# Altium PCB Retain-PCB.PcbDoc
Units mil, origin at the board's own origin, x right, y up, seen from the top; angles counter-clockwise.
Board outline 3300 x 2300 mil, 2 copper layers (Top Layer, Bottom Layer); 9 components, 8 nets, 68 pads, 30 vias.
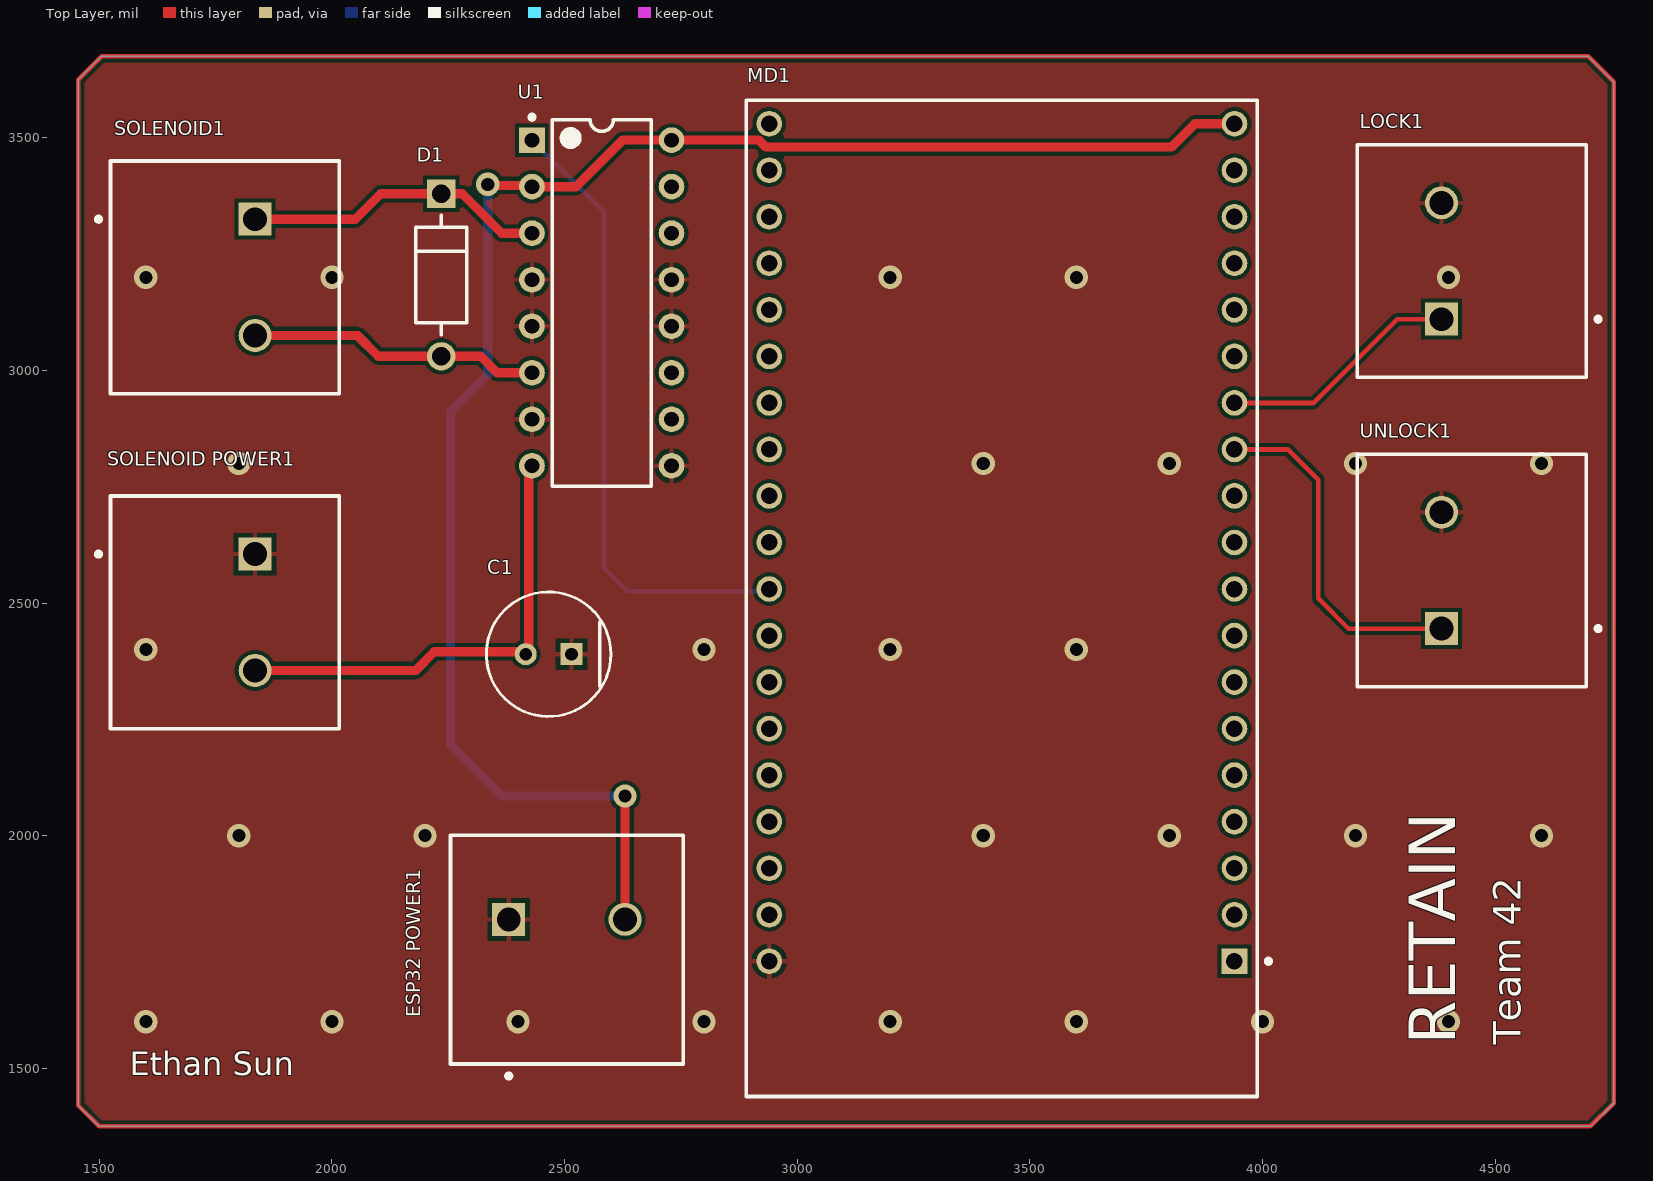
[diagram p0: Top Layer view]
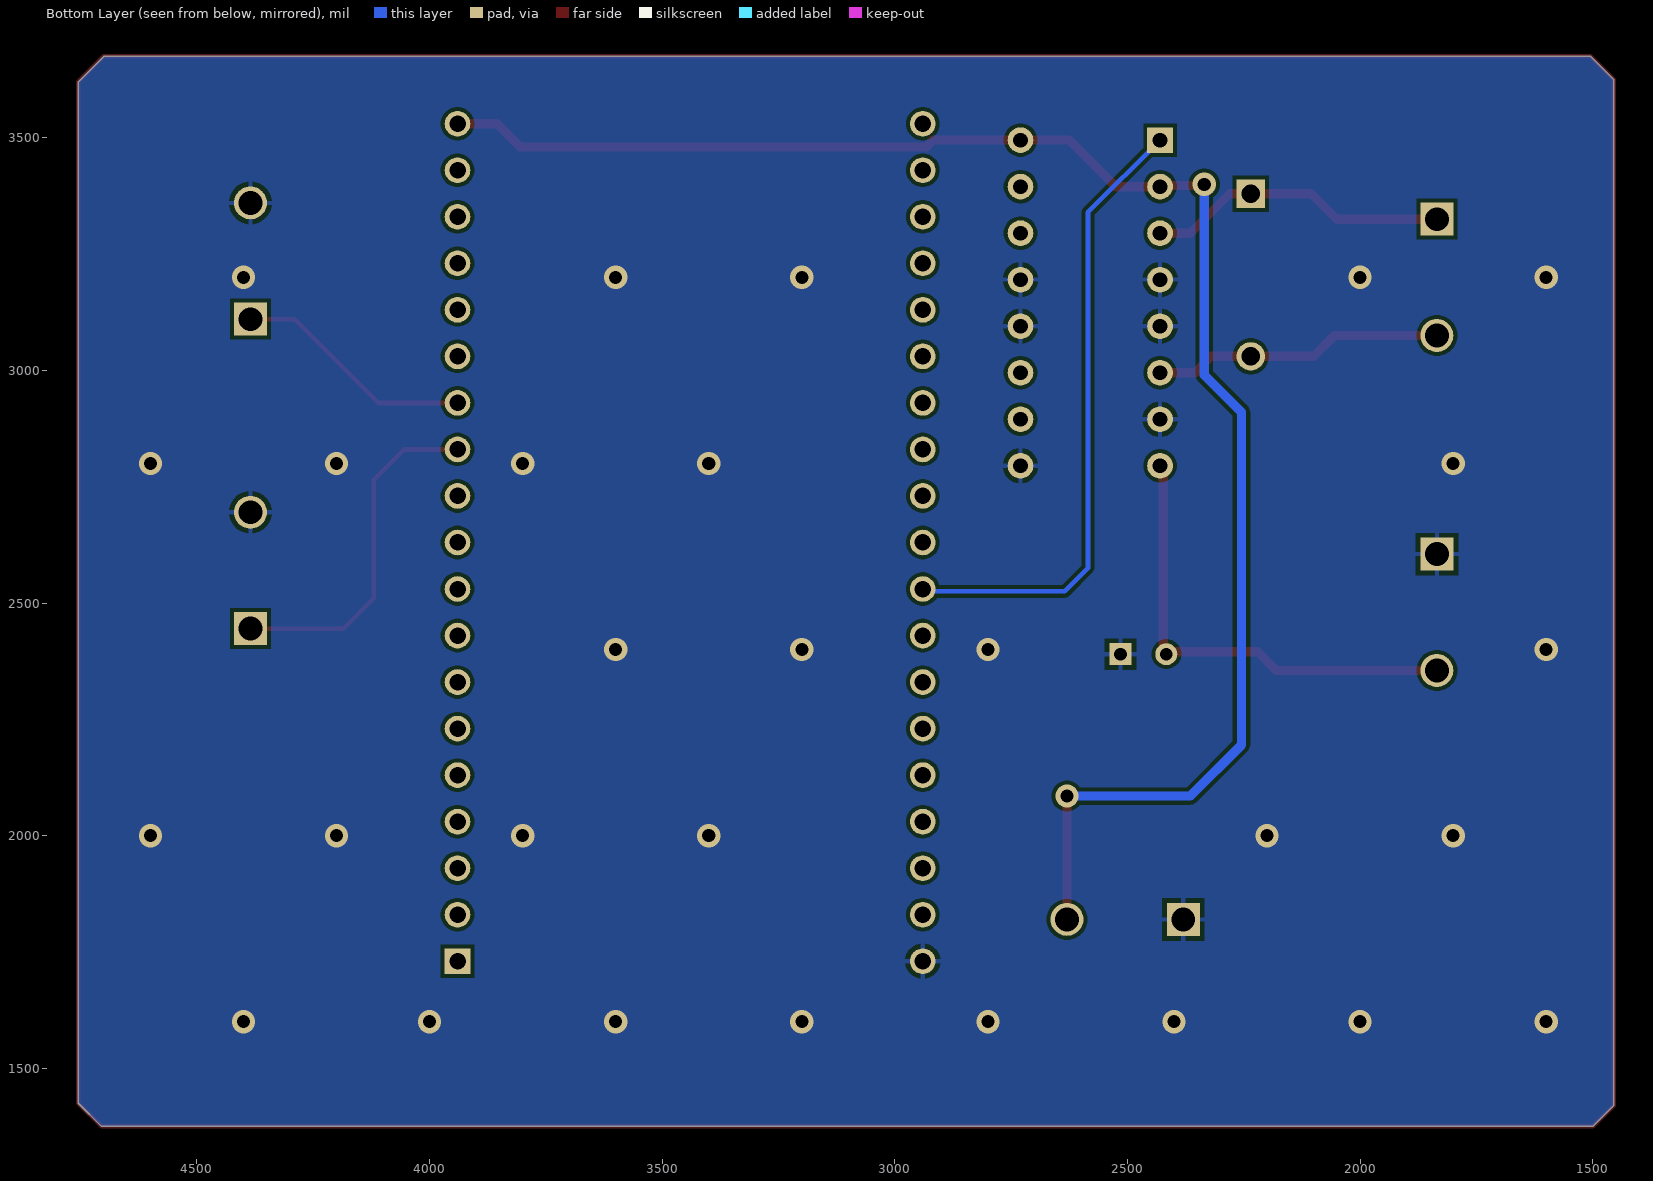
[diagram p1: Bottom Layer view, seen from below]
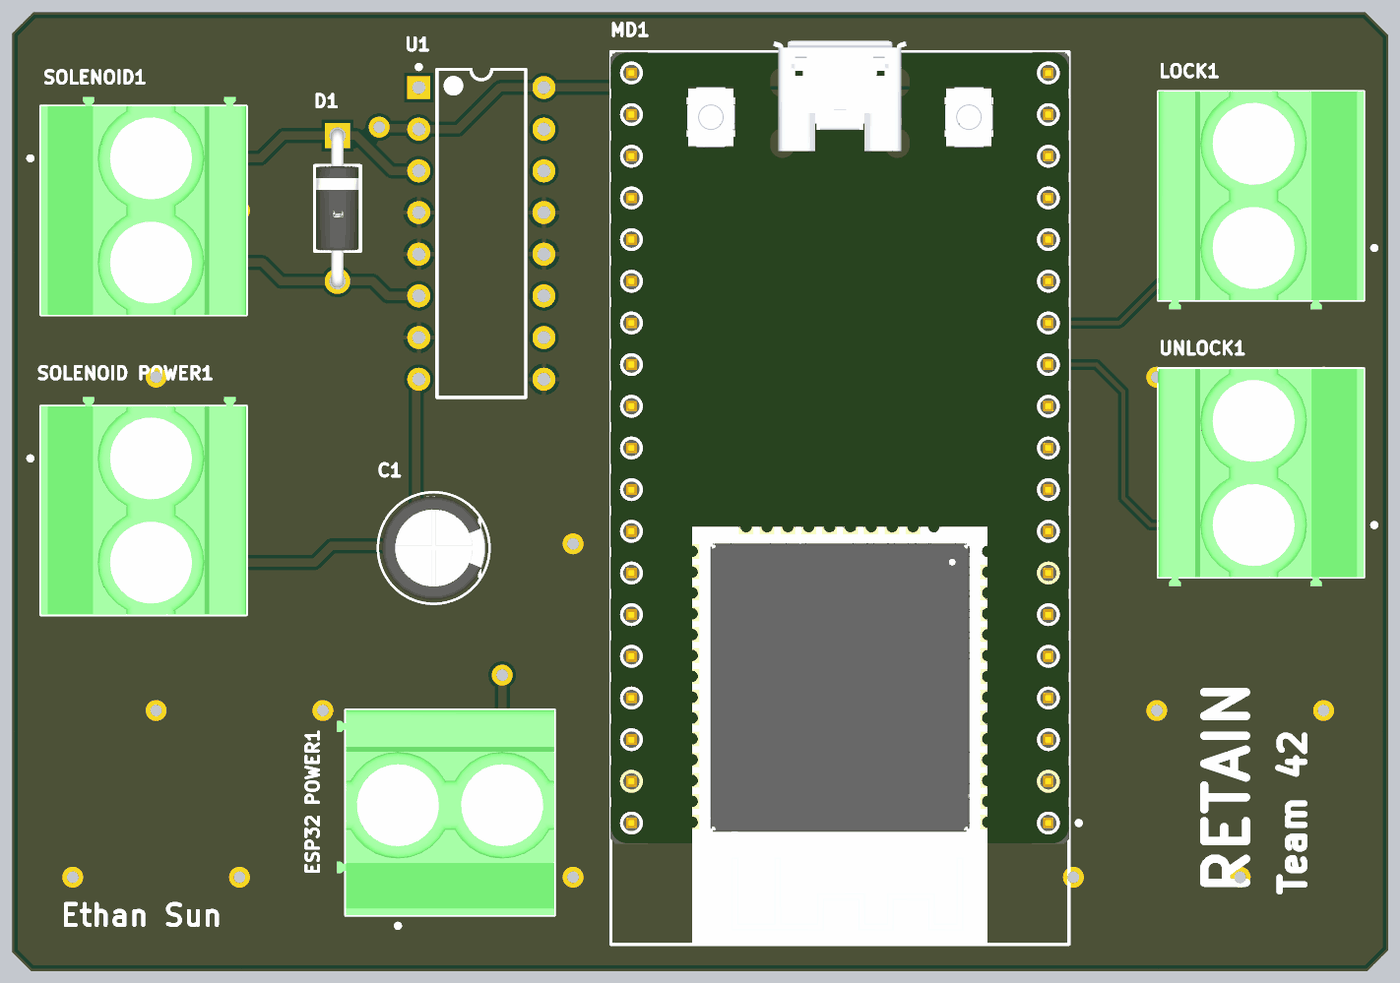
[diagram p2: 3D render of the assembled board from above, using the file's embedded part models]

## Layer stack, top to bottom
Top Solder: solder mask 0.4, Solder Resist, Dk 3.5
Top Layer: signal copper 1.4
Dielectric 1: dielectric 12.6, FR-4, Dk 4.8
Bottom Layer: signal copper 1.4
Bottom Solder: solder mask 0.4, Solder Resist, Dk 3.5

## Board outline
1455,1420 1455,3545 1455,3625 1505,3675 4700,3675 4755,3620 4755,1425 4705,1375 1500,1375

## Design rules (kind name [scope] priority, off if disabled: settings)
AssemblyTestPointUsage [All] p1: isadvanced=TRUE
AssemblyTestpoint [All] p1: isadvanced=TRUE testpointundercomponent=TRUE minsize=40 maxsize=100 preferedsize=60 minholesize=0 maxholesize=40 preferedholesize=32 testpointgrid=1 usegrid=TRUE gridtolerance=0.01 allowsidetop=TRUE allowsidebottom=TRUE
Clearance Clearance_1 [OnMid vs OnMid] p1: gap=8 ignorepadtopadclearanceinfootprint=FALSE sourcerule=39 cellrowname=All cellrowtype=0 cellcolname=All cellcoltype=0 innerlayers=TRUE
Clearance Clearance_2 [(ExistsOnLayer('Top Layer') Or ExistsOnLayer('Bottom Layer')) vs (ExistsOnLayer('Top Layer') Or ExistsOnLayer('Bottom Layer'))] p2: gap=8 ignorepadtopadclearanceinfootprint=FALSE sourcerule=39 cellrowname=All cellrowtype=0 cellcolname=All cellcoltype=0 outerlayers=TRUE
Clearance [All] p3: gap=10 ignorepadtopadclearanceinfootprint=FALSE ismatrix=TRUE
ComponentClearance [All] p1: isadvanced=TRUE gap=10 collisioncheckmode=3 verticalgap=10 showdistances=FALSE
FabricationTestPointUsage [All] p1: isadvanced=TRUE valid=0 allowmultiple=FALSE
FabricationTestpoint [All] p1: isadvanced=TRUE side=3 testpointundercomponent=TRUE minsize=40 maxsize=100 preferedsize=60 minholesize=0 maxholesize=40 preferedholesize=32 testpointgrid=1 allowsidetop=TRUE allowsidebottom=TRUE usegrid=TRUE gridtolerance=0.01
FanoutControl Fanout_BGA [IsBGA] p1: isadvanced=TRUE bgadir=Out bgaviamode=Centered fanoutstyle=Auto fanoutdirection=Alternating viagrid=1 // Fanout_BGA (Default Rule)
FanoutControl Fanout_LCC [IsLCC] p2: isadvanced=TRUE bgadir=Out bgaviamode=Centered fanoutstyle=Auto fanoutdirection=Alternating viagrid=1 // Fanout_LCC (Default Rule)
FanoutControl Fanout_SOIC [IsSOIC] p3: isadvanced=TRUE bgadir=Out bgaviamode=Centered fanoutstyle=Auto fanoutdirection=Alternating viagrid=1 // Fanout_SOIC (Default Rule)
FanoutControl Fanout_Small [(CompPinCount < 5)] p4: isadvanced=TRUE bgadir=Out bgaviamode=Centered fanoutstyle=Auto fanoutdirection=OutThenIn viagrid=1 // Fanout_Small (Default Rule)
FanoutControl Fanout_Default [All] p5: isadvanced=TRUE bgadir=Out bgaviamode=Centered fanoutstyle=Auto fanoutdirection=Alternating viagrid=1 // Fanout_Default (Default Rule)
Height [All] p1: isadvanced=TRUE minheight=0 maxheight=1000 prefheight=500
HoleSize [All] p1: isadvanced=TRUE absolutevalues=TRUE maxlimit=100 minlimit=1 maxpercent=80.000 minpercent=20.000
HoleToHoleClearance [All] p1: isadvanced=TRUE gap=10 allowstackedmicrovias=TRUE
LayerPairs [All] p1: isadvanced=TRUE enforce=TRUE
MinimumSolderMaskSliver [All] p1: isadvanced=TRUE minsoldermaskwidth=10
NetAntennae [All] p1: isadvanced=TRUE netantennaetolerance=0
PasteMaskExpansion [All] p1: isadvanced=TRUE expansion=0
PlaneClearance [All] p1: isadvanced=TRUE clearance=20
PlaneConnect [All] p1: isadvanced=TRUE planeconnectstyle=Relief reliefexpansion=20 reliefentries=4 reliefconductorwidth=10 reliefairgap=10
PolygonConnect [All] p1: connectstyle=Relief reliefconductorwidth=10 reliefentries=4 polygonreliefangle="90 Angle" airgapwidth=10
RoutingCorners [All] p1: isadvanced=TRUE cornerstyle=45-Degree minsetback=100 maxsetback=100
RoutingPriority [All] p1: isadvanced=TRUE routingpriority=0
RoutingVias [All] p1: holewidth=28 width=50 viastyle="Through Hole" minholewidth=28 minwidth=50 maxholewidth=28 maxwidth=50
ShortCircuit [All] p1: isadvanced=TRUE allowed=FALSE
SilkToSilkClearance [All] p1: isadvanced=TRUE silktosilkclearance=10
SilkToSolderMaskClearance [IsPad] p1: isadvanced=TRUE minsilkscreentomaskgap=10 clearancetoexposedcopper=TRUE
SolderMaskExpansion [All] p1: isadvanced=TRUE expansion=0 istentingtop=FALSE
SupplyNets "Schematic Supply Nets_2" [InNet('+9V')] p1: isadvanced=TRUE voltage=0.000
SupplyNets "Schematic Supply Nets_1" [InNet('GND')] p2: isadvanced=TRUE voltage=0.000
SupplyNets "Schematic Supply Nets" [InNet('+5V')] p3: isadvanced=TRUE voltage=0.000
UnRoutedNet [All] p1: isadvanced=TRUE
UnpouredPolygon [All] p1: isadvanced=TRUE
Width [All] p1: maxlimit=10 minlimit=10 preferedwidth=10
4 further rules are at their usual default settings.

## Components (designator, comment, footprint, x,y, rotation, side; value= is the part's Value field where it differs from the comment)
C1 "EEUFM1E101B" FP-RAD-TH-D_6_3_0_5-L_11-MFG 2465.79,2390 r180 top
D1 "1N4007" FP-1N4007-MFG 2235,3205 r270 top value=15pF
"ESP32 POWER1" "1714955" PHOE-1714955_V 2505,1820 r0 top
LOCK1 "1714955" PHOE-1714955_V 4385,3235 r90 top
MD1 "ESP32-DevKitC V4" FP-ESP32-DevKitC_V4-MFG 3440,2510 r180 top
SOLENOID1 "1714955" PHOE-1714955_V 1835,3200 r270 top
"SOLENOID POWER1" "1714955" PHOE-1714955_V 1835,2480 r270 top
U1 "L293D" STM-L293D-16 2580,3145 r0 top
UNLOCK1 "1714955" PHOE-1714955_V 4385,2570 r90 top

## Footprints (in the part's own frame and the unit in brackets; to place one, negate y for a bottom-side part, rotate by r counter-clockwise, add the part's x,y. Pads: shape width x height; smd on the part's side, far side on the other; paste and mask are expansions set on the pad)
FP-1N4007-MFG [mm]
  rect 1.55x1.55 hole 1 paste-2539.97 mask+0: 1(-4.44,0)
  round 1.55 hole 1 paste-2539.97 mask+0: 2(4.44,0)
  silkscreen extent -3.26,-1.4 3.26,1.4, body extent -5.32,-1.5 5.32,1.5, height 0.25
FP-ESP32-DevKitC_V4-MFG [mm]
  rect 1.4x1.4 hole 0.9 paste-2539.97 mask+0: 1(-12.7,19.81)
  round 1.4 hole 0.9 paste-2539.97 mask+0: 2(-12.7,17.27) 3(-12.7,14.73) 4(-12.7,12.19) 5(-12.7,9.65) 6(-12.7,7.11) 7(-12.7,4.57) 8(-12.7,2.03) 9(-12.7,-0.51) 10(-12.7,-3.05) 11(-12.7,-5.59) 12(-12.7,-8.13) 13(-12.7,-10.67) 14(-12.7,-13.21) 15(-12.7,-15.75) 16(-12.7,-18.29) 17(-12.7,-20.83) 18(-12.7,-23.37) 19(-12.7,-25.91) 20(12.7,-25.91) 21(12.7,-23.37) 22(12.7,-20.83) 23(12.7,-18.29) 24(12.7,-15.75) 25(12.7,-13.21) 26(12.7,-10.67) 27(12.7,-8.13) 28(12.7,-5.59) 29(12.7,-3.05) 30(12.7,-0.51) 31(12.7,2.03) 32(12.7,4.57) 33(12.7,7.11) 34(12.7,9.65) 35(12.7,12.19) 36(12.7,14.73) 37(12.7,17.27) 38(12.7,19.81)
  silkscreen extent -14.67,-27.2 13.95,27.2, body extent -14.05,-27.3 14.05,27.3, height 0.25
FP-RAD-TH-D_6_3_0_5-L_11-MFG [mm]
  rect 1.2x1.2 hole 0.7 paste-2539.97 mask+0: 1(-1.25,0)
  round 1.2 hole 0.7 paste-2539.97 mask+0: 2(1.25,0)
  silkscreen extent -3.4,-3.4 3.4,3.4, body extent -3.5,-3.5 3.5,3.5, height 0.25
PHOE-1714955_V [mm] "Terminal Block, 2-Leads, Body 12.7x12.5mm, Pitch 6.35mm"
  rect 1.8x1.8 hole 1.3: 1(-3.175,0)
  round 1.8 hole 1.3: 2(3.175,0)
  silkscreen extent -6.35,-8.67 6.35,4.6, body extent -6.92,-7.9 6.35,4.6, height 21.51
STM-L293D-16 [mm] "DIP, 16-Leads, Body 20x6.85mm, Pitch 2.54mm"
  rect 1.4x1.4 hole 0.8: 1(-3.81,8.89)
  round 1.4 hole 0.8: 2(-3.81,6.35) 3(-3.81,3.81) 4(-3.81,1.27) 5(-3.81,-1.27) 6(-3.81,-3.81) 7(-3.81,-6.35) 8(-3.81,-8.89) 9(3.81,-8.89) 10(3.81,-6.35) 11(3.81,-3.81) 12(3.81,-1.27) 13(3.81,1.27) 14(3.81,3.81) 15(3.81,6.35) 16(3.81,8.89)
  silkscreen extent -3.93,-10 2.7,10.26, body extent -3.93,-10 3.93,10, height 5.1

## Part data
C1: library part CMP-05427-000856-1, "Aluminum Electrolytic Capacitors (Radial Lead Type) 100uF ±20% 25V", Capacitance=100uF, Case/Package=Radial, ESR (Equivalent Series Resistance)=130mR, Max Operating Temperature=105°C, Min Operating Temperature=-40°C, Package Quantity=2000, Ripple Current=455mA, Tolerance=20%, Voltage Rating=25V, Diameter=6mm, Height - Seated (Max)=0.5inch, Impedance=130mR, Lead Diameter=0.5mm, Lead Pitch=5mm, Length=11mm, Life (Hours)=2000Hour, Mount="Through Hole", Packaging="Tape and Reel", Polarity=Polar, RoHS Compliant=Yes, Series=FM, Termination=Radial, Voltage Rating (DC)=25V
D1: library part CMP-123542-000001-1, "Rectifier diode 1000 V 1 A DO-41, ,", Capacitance=15pF, Forward Current=1A, Manufacturer=Diotec, Max Junction Temp=+175°C, Max Repetitive Reverse Voltage=1000V, Max Surge Forward Current=27A, Peak Reverse Current=5uA, Temperature="-50°C to +175°C", Temperature Range Low=-50°C, Automotive=No, Category=Diode, ComponentLink2Description=Datasheet, ComponentLink2URL=https://datasheet.octopart.com/1N4007-Diotec-datasheet-62346875.pdf, Device Class L1="Discrete Semiconductors", Device Class L2=Diodes, Device Class L3="Rectifier Diodes", Height=2.8mm, Ipc Land Pattern Name=DIOAD888W100L520D280, Lead Free=Yes, Manufacturer Part Number=1N4007, Octopart=https://octopart.com/1n4007-diotec-4040411, Package=1N4007, Reverse Voltage=1000V, RoHS=TRUE, Temperature Range High=+175°C
"ESP32 POWER1" LOCK1 SOLENOID1 "SOLENOID POWER1" UNLOCK1: library part CMP-2000-05797-1, "PC Terminal Block, Pitch 6.35 mm, 1 x 2 Position, Height 21.5 mm, Tail Lenght 5.1 mm, RoHS, Bulk", Manufacturer="Phoenix Contact", Package Description="PC Terminal Block, Pitch 6.35 mm, 1 x 2 Position, Height 21.5 mm, Tail Lenght 5.1 mm", Datasheet URL=http://media.digikey.com/pdf/Data%20Sheets/Phoenix%20Contact%20PDFs/1714955.pdf, Datasheet Version=02/2010, Manufacturer URL=http://www.phoenixcontact.com/, Mounting Technology=ThroughHole, Package Reference=1714955
MD1: library part CMP-194065-000004-1, "WiFi Development Tools (802.11) ESP32 General Development Kit, ESP32-WROOM-32 on the board", Manufacturer=Espressif, Max Frequency=2.5GHz, Max Supply Voltage=5V, Min Supply Voltage=2.7V, Temperature="-40°C to", Temperature Range Low=-40°C, Automotive=No, Bandwidth=2.4-2.5GHz, Category=UNK, ComponentLink2Description=Datasheet, ComponentLink2URL=https://docs.espressif.com/projects/esp-idf/en/latest/get-started/get-started-devkitc.html, Device Class L1="Integrated Circuits (ICs)", Device Class L2="RF Semiconductors and Devices", Device Class L3=Transceivers, Interface=I2C,SPI,UART,I2S, Lead Free=Yes, Manufacturer Part Number="ESP32-DevKitC V4", Number Of Adc Channels=16, Number Of Gpio=22, Octopart=https://octopart.com/esp32-devkitc+v4-espressif+systems-107467262, Package="ESP32-DevKitC V4", RoHS=TRUE
U1: library part CMP-2000-06524-1, "Push-Pull Four Channel Driver with Diode, 4.5 to 36 V, -40 to 150 degC, 16-Pin PDIP, RoHS, Tube", Current - Output / Channel=600mA, Current - Peak Output=1.2A, Manufacturer=STMicroelectronics, On-State Resistance=-, Operating Temperature=-40°C~150°C, Package / Case="16-DIP(0.300\",7.62mm)", Package Description="16-Pin Thru-Hole Dual-In-Line, Body 20 x 6.85 mm, Pitch 2.54 mm", Package Reference=DIP-16, Standard Package=25, Supplier Device Package=16-PowerDIP, Voltage - Supply=4.5V~36V, Category=IntegratedCircuits(ICs), Datasheet URL=http://www.st.com/st-web-ui/static/active/en/resource/technical/document/datasheet/CD00000059.pdf, Datasheet Version=07/2003, Dynamic Catalog=HalfBridge, Family=PMIC-MOSFET,BridgeDrivers-InternalSwitch, Input Type=Non-Inverting, Manufacturer URL=http://www.st.com/, Mounting Technology=ThroughHole, Mounting Type=ThroughHole, Number of Outputs=4, Other Names=497-2936-5, Other Related Documents=L293DViewAllSpecifications, Packaging=Tube, PartNumber=L293D, Series=-, Type=HalfBridge

## Via types
v1: diameter 50, hole 28, Top Layer to Bottom Layer, 30 vias

## Nets (pads, with @x,y where several pads share a name; then routed paths per layer and width w, separated by ;. In a path a pad name is that pad's centre, name@x,y a point inside that pad or via, vN(x,y) a via of type N, cw(c..) or ccw(c..) an arc to the next point about the centre after c; other vN are vias at no path point)
+5V: "ESP32 POWER1.2" MD1.19 U1.2 U1.16 | length 3599.1
  Top Layer w10: v1(2335,3400) v1@2337.5,3397.5 ; U1.2@2427.5,3397.5 U1.2
  Top Layer w20: v1@2337.5,3397.5 U1.2@2427.5,3397.5 ; U1.2 2525,3395 2625,3495 U1.16 2917.72,3495 2932.72,3480 3805,3480 3855.08,3530.08 MD1.19 ; 2630,1820 v1(2630,2085)
  Bottom Layer w20: v1(2335,3400) 2335,2990 2255,2910 2255,2195 2365,2085 v1(2630,2085)
+9V: "SOLENOID POWER1.2" C1.2 U1.8 | length 1010.8
  Top Layer w20: 1835,2355 2180,2355 2220,2395 2411.57,2395 C1.2 2423.29,2396.71 2423.29,2788.29 U1.8
GND: "ESP32 POWER1.1" "SOLENOID POWER1.1" C1.1 LOCK1.2 MD1.38 U1.4 U1.5 U1.7 U1.9 U1.12 U1.13 UNLOCK1.2
  other v1: 1600,1600 2000,1600 2400,1600 2800,1600 3200,1600 3600,1600 4000,1600 4400,1600 1800,2000 2200,2000 3400,2000 3800,2000 4200,2000 4600,2000 1600,2400 2800,2400 3200,2400 3600,2400 1800,2800 3400,2800 3800,2800 4200,2800 4600,2800 1600,3200 2000,3200 3200,3200 3600,3200 4400,3200
NetD1_1: D1.1 SOLENOID1.1 U1.3 | length 652.8
  Top Layer w20: SOLENOID1.1 2050,3325 2104.8,3379.8 D1.1 2280.2,3379.8 2365,3295 U1.3
NetD1_2: D1.2 SOLENOID1.2 U1.6 | length 628.1
  Top Layer w20: SOLENOID1.2 2055,3075 2099.8,3030.2 D1.2 2319.8,3030.2 2355,2995 U1.6
NetLOCK1_1: LOCK1.1 MD1.13 | length 519.6
  Top Layer w10: MD1.13 3940.08,2930 4110,2930 4290,3110 LOCK1.1
NetMD1_12: MD1.12 UNLOCK1.1 | length 753.9
  Top Layer w10: MD1.12 4054.92,2830.08 4120,2765 4120,2510 4185,2445 UNLOCK1.1
NetMD1_30: MD1.30 U1.1 | length 1362
  Bottom Layer w10: U1.1 2585,3340 2585,2575 2635,2525 2934.92,2525 MD1.30
pads on no net: MD1.1 MD1.2 MD1.3 MD1.4 MD1.5 MD1.6 MD1.7 MD1.8 MD1.9 MD1.10 MD1.11 MD1.14 MD1.15 MD1.16 MD1.17 MD1.18 MD1.20 MD1.21 MD1.22 MD1.23 MD1.24 MD1.25 MD1.26 MD1.27 MD1.28 MD1.29 MD1.31 MD1.32 MD1.33 MD1.34 MD1.35 MD1.36 MD1.37 U1.10 U1.11 U1.14 U1.15
copper on no net: | length 11082.8
  Top Layer w10: 1455,1420 1455,3545 1455,3625 1505,3675 1555,3675 4475,3675 4700,3675 4755,3620 4755,1425 4705,1375 2235,1375 1530,1375 1500,1375 1455,1420

## Polygon pours and split planes (outlines as drawn)
GND on Bottom Layer "GND_L02_P001" (solid, pour order 1): 1455,3625 1505,3675 4700,3675 4755,3620 4755,1425 4705,1375 1500,1375 1455,1420
GND on Top Layer "GND_L01_P002" (solid, pour order 2): 1455,3625 1505,3675 4700,3675 4755,3620 4755,1425 4705,1375 1500,1375 1455,1420

## Silkscreen, mask and mechanical layers (free items; w line width, h text height)
Top Overlay:
  text "RETAIN" at 4415,1550 h100 r90
  text "Team 42" at 4555,1550 h60 r90
  text "Ethan Sun" at 1565,1485 h50